# EAGLE board MCU board ATmega168p v1.0 (EAGLE 9.2.1)

Size 20.3 x 25.07 mm. Coordinates in mm from the lower left corner, seen from the top.
Outline: 0,0 20.3,0 20.3,25.07 0,25.07 0,0
Copper layers (1*16): Top 0.035mm / dielectric 1.5mm / Bottom 0.035mm
Design rules "default": minimum track width 6mil, minimum drill 0.35mm, track to track 6mil, track to pad 6mil, pad to pad 6mil, via to via 6mil, smd to smd 6mil, copper to edge 40mil, drill to drill 6mil, minimum pad ring 10mil, minimum via ring 8mil, stop-mask expansion 4mil, vias tented up to drill 0mil, thermal gap 10mil

## Footprints (pad centres in the part's own frame; a part is rotated, then mirrored left to right if it is on the bottom)
0402 = smd 0.85 x 0.9: 1 -0.58,0; 2 0.58,0
0603 = smd 1.1 x 1: 1 -0.85,0; 2 0.85,0
SOP65P780X200-28N = smd 1.8 x 0.45: 1 -3.55,4.225; 2 -3.55,3.575; 3 -3.55,2.925; 4 -3.55,2.275; 5 -3.55,1.625; 6 -3.55,0.975; 7 -3.55,0.325; 8 -3.55,-0.325; 9 -3.55,-0.975; 10 -3.55,-1.625; 11 -3.55,-2.275; 12 -3.55,-2.925; 13 -3.55,-3.575; 14 -3.55,-4.225; 15 3.55,-4.225; 16 3.55,-3.575; 17 3.55,-2.925; 18 3.55,-2.275; 19 3.55,-1.625; 20 3.55,-0.975; 21 3.55,-0.325; 22 3.55,0.325; 23 3.55,0.975; 24 3.55,1.625; 25 3.55,2.275; 26 3.55,2.925; 27 3.55,3.575; 28 3.55,4.225
QFN45P400X400X100-29N = smd 0.7 x 0.25: 1 -2.05,1.35; 2 -2.05,0.9; 3 -2.05,0.45; 4 -2.05,0; 5 -2.05,-0.45; 6 -2.05,-0.9; 7 -2.05,-1.35; 15 2.05,-1.35; 16 2.05,-0.9; 17 2.05,-0.45; 18 2.05,0; 19 2.05,0.45; 20 2.05,0.9; 21 2.05,1.35 | smd 0.25 x 0.7: 8 -1.35,-2.05; 9 -0.9,-2.05; 10 -0.45,-2.05; 11 0,-2.05; 12 0.45,-2.05; 13 0.9,-2.05; 14 1.35,-2.05; 22 1.35,2.05; 23 0.9,2.05; 24 0.45,2.05; 25 0,2.05; 26 -0.45,2.05; 27 -0.9,2.05; 28 -1.35,2.05 | smd 2.45 x 2.45: 29 0,0
MINI-SO8 = smd 0.41 x 1.02: 1 -0.975,-2.4; 2 -0.325,-2.4; 3 0.325,-2.4; 4 0.975,-2.4; 5 0.975,2.4; 6 0.325,2.4; 7 -0.325,2.4; 8 -0.975,2.4
2X3-NS = drill 1.016 pad 1.88: 1 -2.54,-1.27; 2 -2.54,1.27; 3 0,-1.27; 4 0,1.27; 5 2.54,-1.27; 6 2.54,1.27
SMARTLED-TTW = smd 0.8 x 0.5: A 0,-0.875; C 0,0.875 | smd 0.35 x 0.35: A@1 0,-0.5; C@1 0,0.5
2,15/1,0 = drill 1.016 pad 2.159 octagon: 1 0,0
SMD1,27-2,54 = smd 1.27 x 2.54: 1 0,0

## Placement (x,y rotation side)
C1  0.1uF  [0402]  10.16,20.32 0 top
C2  10uF  [0603]  6.35,20.32 180 top
C3  22pF  [0603]  2.54,22.86 0 top
C4  22pF  [0603]  6.35,22.86 180 top
IC1  MCP25625-E_SS  [SOP65P780X200-28N]  6.35,12.7 0 top
IC2  ATMEGA328P-MMH  [QFN45P400X400X100-29N]  15.24,10.16 0 top
IC3  LM2936MM-5.0  [MINI-SO8]  15.24,3.81 270 top
J1  AVR_SPI_PROG_3X2NS  [2X3-NS]  6.35,3.81 0 top
LED1  [SMARTLED-TTW]  16.51,22.86 180 top
P_CANH  [2,15/1,0]  0,7.62 0 top
P_CANL  [2,15/1,0]  0,2.54 0 top
P_GND  [2,15/1,0]  0,12.7 0 top
P_I/O1  [2,15/1,0]  20.32,22.86 0 top
P_I/O2  [2,15/1,0]  20.32,17.78 0 top
P_I/O3  [2,15/1,0]  20.32,12.7 0 top
P_I/O4  [2,15/1,0]  20.32,7.62 0 top
P_I/O5  [2,15/1,0]  20.32,2.54 0 top
P_VCC  [2,15/1,0]  0,17.78 0 top
R1  10k  [0603]  2.54,20.32 180 top
RES_PAD1  [SMD1,27-2,54]  10.16,22.86 270 top
RES_PAD2  [SMD1,27-2,54]  13.97,22.86 90 top

## Library data of the parts
C1 = SparkFun-Capacitors; PROD_ID: CAP-12416
C2 = SparkFun-Capacitors; PROD_ID: CAP-11015
C3 C4 = SparkFun-Capacitors; PROD_ID: CAP-07876
IC1 = MCP25625-E_SS; ALLIED_NUMBER: 70415903; ALLIED_PRICE-STOCK: https://www.alliedelec.com/microchip-technology-inc-mcp25625-e-ss/70415903/; ARROW_PART_NUMBER: MCP25625-E/SS; ARROW_PRICE-STOCK: https://www.arrow.com/en/products/mcp25625-ess/microchip-technology; DESCRIPTION: CAN Controller with Transceiver SSOP28 Microchip MCP25625-E/SS, CAN Controller 1MBps CAN 2.0, 28-Pin SSOP; HEIGHT: 2mm; MANUFACTURER_NAME: Microchip; MANUFACTURER_PART_NUMBER: MCP25625-E/SS; RS_PART_NUMBER: 1651935; RS_PRICE-STOCK: http://uk.rs-online.com/web/p/products/1651935
IC2 = ATMEGA328P-MMH; ARROW_PART_NUMBER: ATMEGA328P-MMH; ARROW_PRICE-STOCK: https://www.arrow.com/en/products/atmega328p-mmh/microchip-technology; DESCRIPTION: Atmel ATMEGA328P-MMH, 8bit AVR Microcontroller, 20MHz, 32 kB Flash, 28-Pin QFN; HEIGHT: 1mm; MANUFACTURER_NAME: Microchip; MANUFACTURER_PART_NUMBER: ATMEGA328P-MMH; RS_PART_NUMBER: 1310272P; RS_PRICE-STOCK: http://uk.rs-online.com/web/p/products/1310272P
IC3 = national-semiconductor; MF: NATIONAL SEMICONDUCTOR; MPN: LM2936MM-5.0/NOPB; OC_FARNELL: 1312707; OC_NEWARK: 41K4518
J1 = SparkFun-Connectors
LED1 = led
P_CANH P_CANL P_GND P_I/O1-P_I/O5 P_VCC RES_PAD1 RES_PAD2 = wirepad
R1 = SparkFun-Resistors; PROD_ID: RES-00824

## Nets
5V: C2.1 IC1.1 IC1.19 IC1.27 IC3.1 J1.2 R1.2
12V: C1.1 IC3.8
CANH: IC1.4 P_CANH.1
CANL: IC1.3 P_CANL.1
CLK_CAN_OUT: IC1.22
CS_CAN: IC1.17
GND: C1.2 C2.2 C3.1 C4.1 IC1.5 IC1.10 IC1.26 IC3.7 J1.6 P_GND.1 RES_PAD2.1
I/O1: P_I/O1.1
I/O2: P_I/O2.1
I/O3: P_I/O3.1
I/O4: P_I/O4.1
I/O5: P_I/O5.1
IND_LED: LED1.C@1
MISO: IC1.16 J1.1
MOSI: IC1.15 J1.4
N$1: C4.2 IC1.9
N$2: C3.2 IC1.8
N$3: IC1.21 IC1.28
N$4: IC1.20 IC1.24
N$5: LED1.A@1
RESET_MCU: J1.5 R1.1 RES_PAD1.1
SCK: IC1.14 J1.3
VCC: P_VCC.1

## Tracks (layer width: path | path; a pad name or v marks a point on that pad's centre or on a via)
5V  (6 unrouted)
12V  (1 unrouted)
CANH  (1 unrouted)
CANL  (1 unrouted)
GND  (10 unrouted)
MISO  (1 unrouted)
MOSI  (1 unrouted)
N$1  (1 unrouted)
N$2  (1 unrouted)
N$3  (1 unrouted)
N$4  (1 unrouted)
RESET_MCU  (2 unrouted)
SCK  (1 unrouted)
(copper drawn outside any net)
  shapes: Top area x2